# EAGLE board Qwiic MP3 Trigger-Panel (EAGLE 9.2.2), part 1 of 6
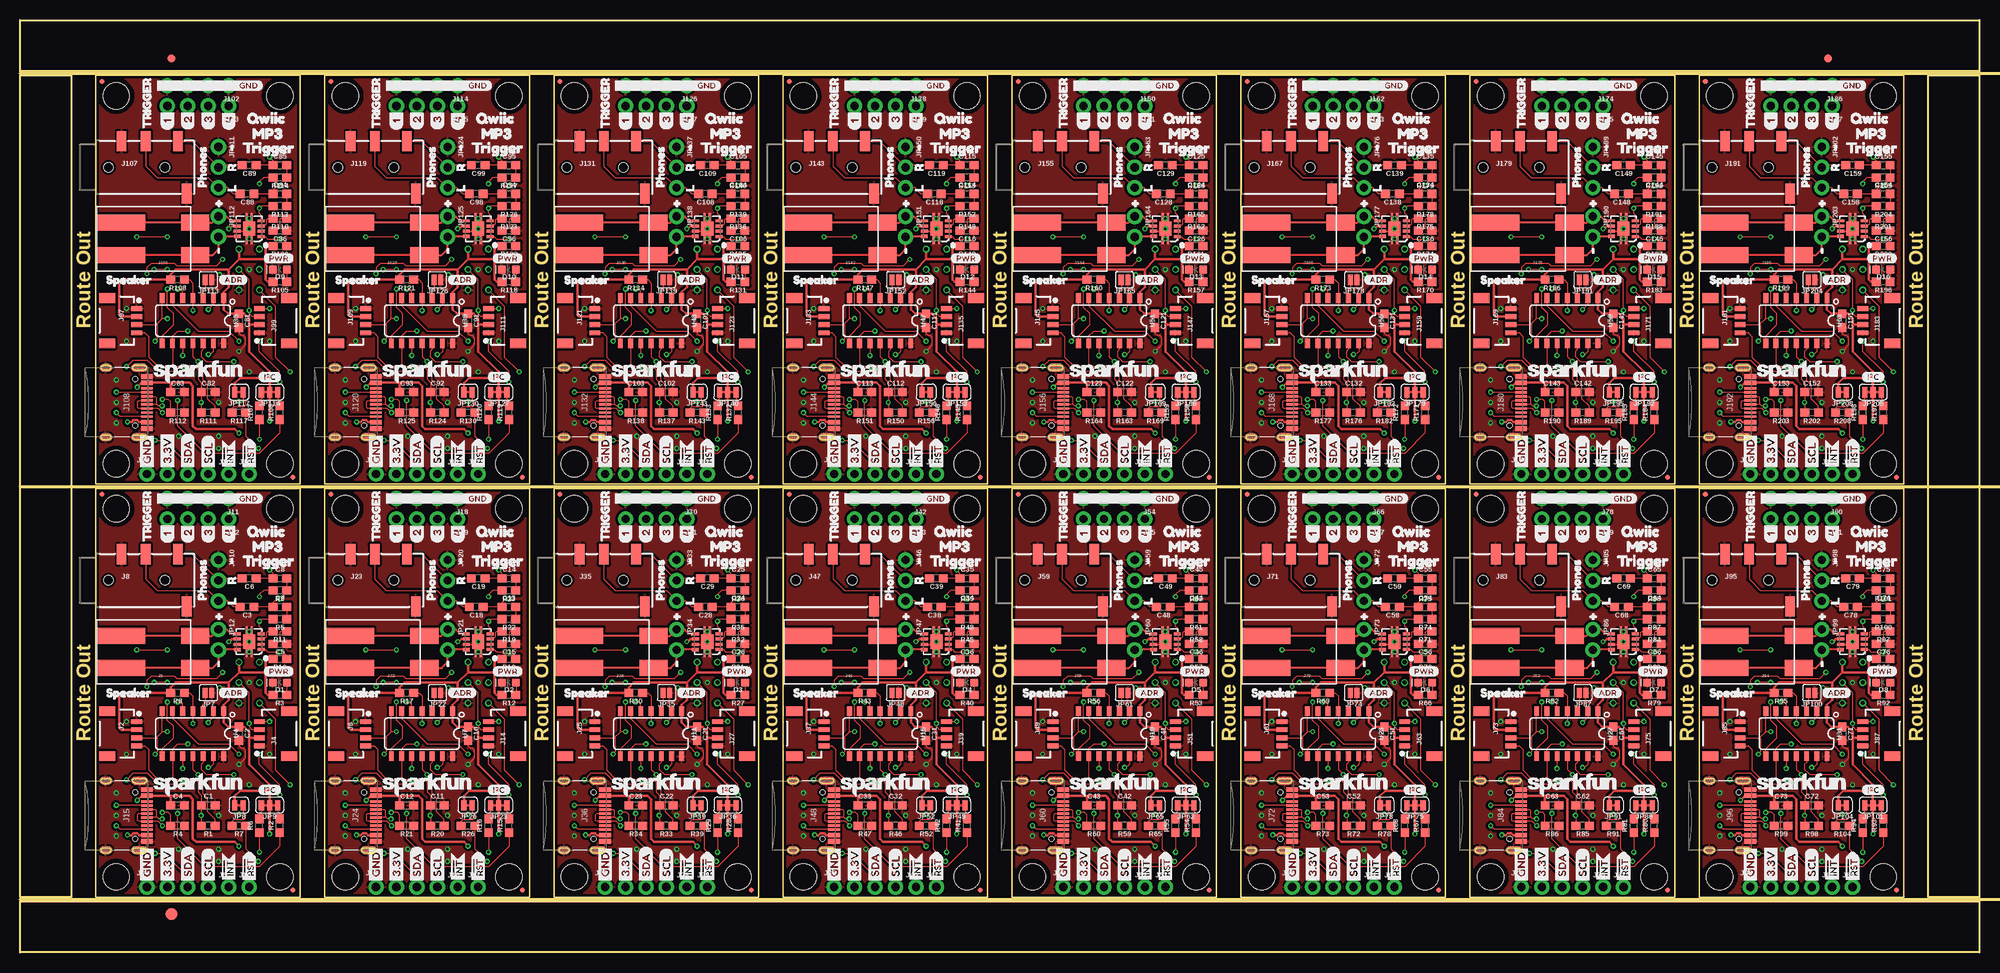
[diagram p0: board, top side]
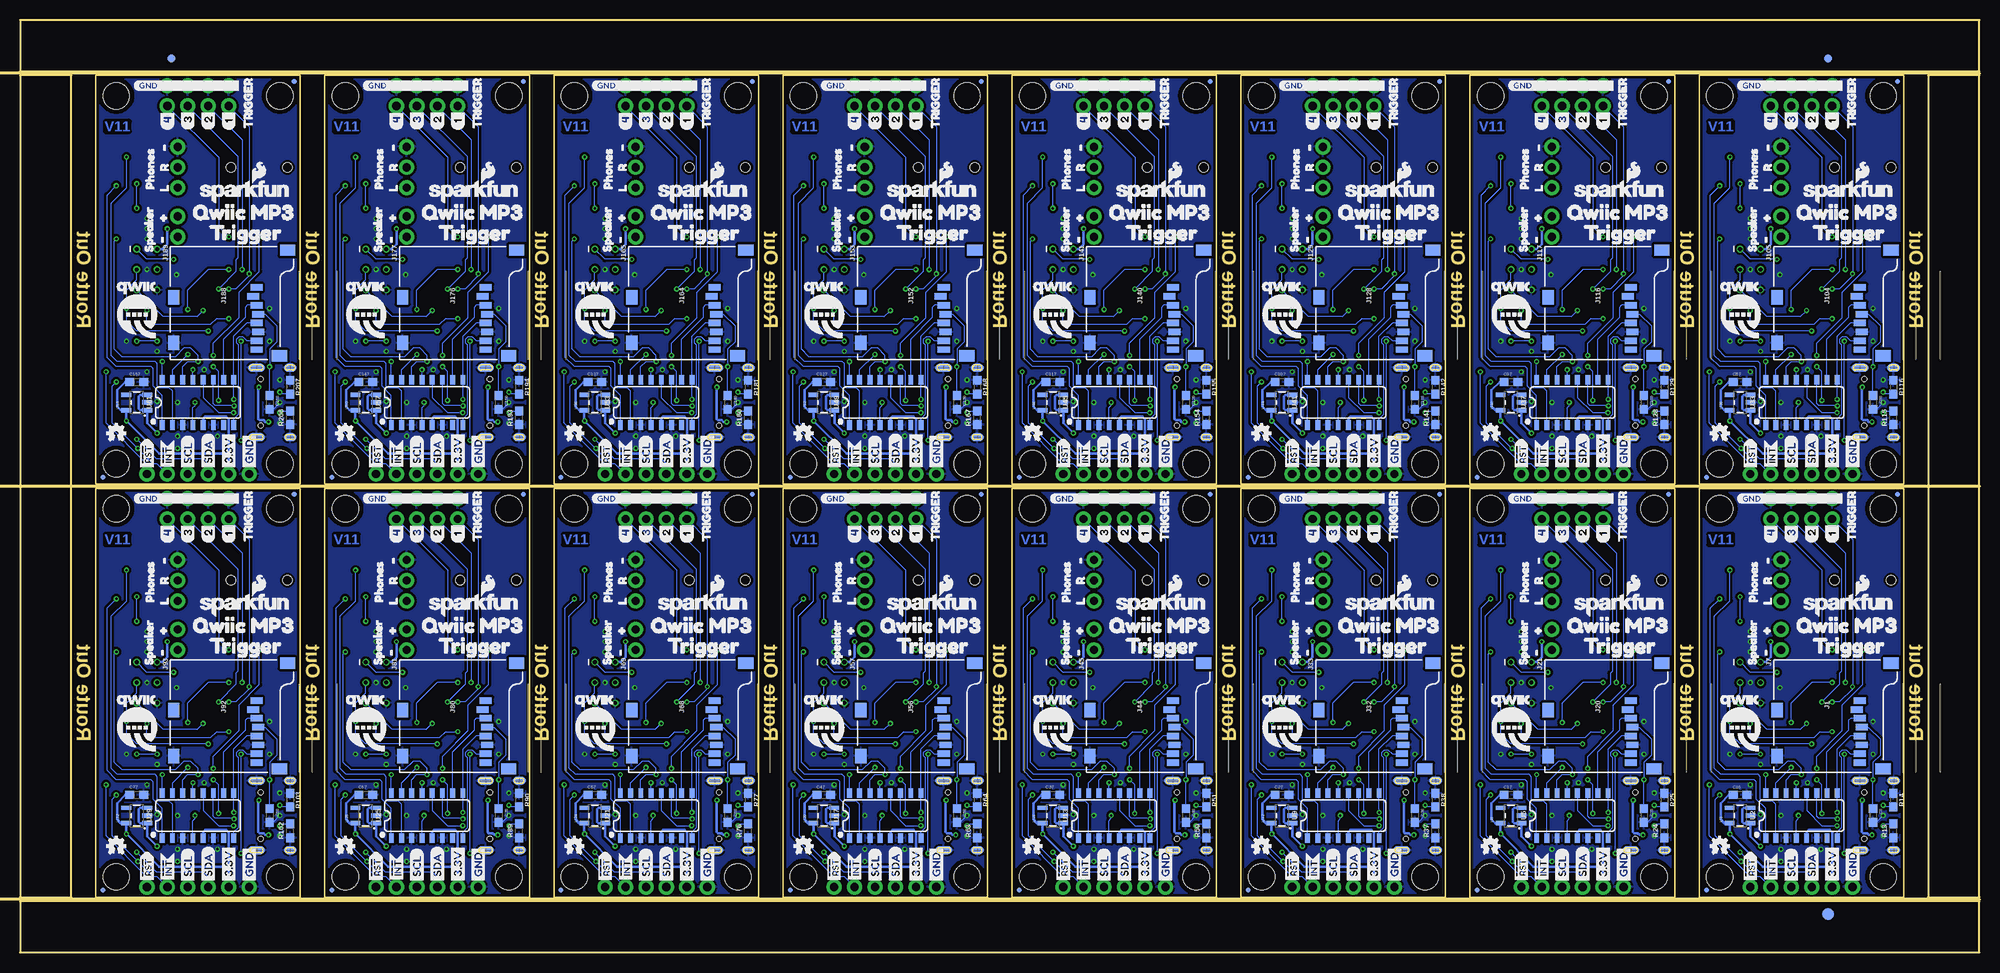
[diagram p1: board, bottom side, seen from below]

Size 243.33 x 115.82 mm. Coordinates in mm from the lower left corner, seen from the top.
Outline: 9.4,6.86 9.4,57.66 34.8,57.66 34.8,6.86 9.4,6.86
Outline: 37.85,6.86 37.85,57.66 63.25,57.66 63.25,6.86 37.85,6.86
Outline: 66.29,6.86 66.29,57.66 91.69,57.66 91.69,6.86 66.29,6.86
Outline: 94.74,6.86 94.74,57.66 120.14,57.66 120.14,6.86 94.74,6.86
Outline: 123.19,6.86 123.19,57.66 148.59,57.66 148.59,6.86 123.19,6.86
Outline: 151.64,6.86 151.64,57.66 177.04,57.66 177.04,6.86 151.64,6.86
Outline: 180.09,6.86 180.09,57.66 205.49,57.66 205.49,6.86 180.09,6.86
Outline: 208.53,6.86 208.53,57.66 233.93,57.66 233.93,6.86 208.53,6.86
Outline: 9.4,58.17 9.4,108.97 34.8,108.97 34.8,58.17 9.4,58.17
Outline: 37.85,58.17 37.85,108.97 63.25,108.97 63.25,58.17 37.85,58.17
Outline: 66.29,58.17 66.29,108.97 91.69,108.97 91.69,58.17 66.29,58.17
Outline: 94.74,58.17 94.74,108.97 120.14,108.97 120.14,58.17 94.74,58.17
Outline: 123.19,58.17 123.19,108.97 148.59,108.97 148.59,58.17 123.19,58.17
Outline: 151.64,58.17 151.64,108.97 177.04,108.97 177.04,58.17 151.64,58.17
Outline: 180.09,58.17 180.09,108.97 205.49,108.97 205.49,58.17 180.09,58.17
Outline: 208.53,58.17 208.53,108.97 233.93,108.97 233.93,58.17 208.53,58.17
Outline: 0,6.35 243.33,6.35 243.33,0 0,0 0,6.35
Outline: 236.98,108.97 243.33,108.97 243.33,6.86 236.98,6.86 236.98,108.97
Outline: 0,115.82 243.33,115.82 243.33,109.47 0,109.47 0,115.82
Outline: 0,108.97 6.35,108.97 6.35,6.86 0,6.86 0,108.97
Copper layers (1*16): Top 0.035mm / dielectric 1.5mm / Bottom 0.035mm
Design rules "SparkFun-2-layer-PCBWay-LIMIT": minimum track width 6mil, minimum drill 0.3mm, track to track 6mil, track to pad 6mil, pad to pad 6mil, via to via 6mil, smd to smd 6mil, copper to edge 6mil, drill to drill 6mil, minimum pad ring 6mil, minimum via ring 6mil, stop-mask expansion 4mil, vias tented up to drill 25mil, thermal gap 10mil
Net classes: 1 3.3V: width 0.305 mm
Milling: 3 lines

## Footprints (pad centres in the part's own frame; a part is rotated, then mirrored left to right if it is on the bottom)
0603 = smd 1.1 x 1: 1 -0.85,0; 2 0.85,0
LED-0603 = smd 1 x 1: A -0.877,0; C 0.877,0
FIDUCIAL-1X2 = smd 1 x 1: 1 0,0
FIDUCIAL-1.5X3 = smd 1.5 x 1.5: 1 0,0
MICRO-SD-SOCKET = smd 1.8 x 1.4: CD1 -2.05,0.4; CD2 -7.75,0.4 | smd 0.8 x 1.5: CS -7.84,10.3; DI -6.74,10.7; DO -2.34,10.7; GND -3.44,10.9; RSV1 -8.94,10.7; RSV2 -1.24,10.7; SCLK -4.54,10.7; VCC -5.64,10.9 | smd 1.4 x 1.9: GND1 -13.6,14.55; GND3 -0.45,13.55
1X04_1MM_RA = smd 0.6 x 1.35: 1 -1.5,0; 2 -0.5,0; 3 0.5,0; 4 1.5,0 | smd 1.2 x 2: NC1 2.8,-3.675; NC2 -2.8,-3.675
1X04_NO_SILK = drill 1.016 pad 1.88: 1 0,0; 2 2.54,0; 3 5.08,0; 4 7.62,0
1X01_NO_SILK = drill 1.016 pad 1.88: 1 0,0
2X3_TEST_POINTS = drill 0.508: 1 -2.54,-1.27; 2 -2.54,1.27; 3 0,-1.27; 4 0,1.27; 5 2.54,-1.27; 6 2.54,1.27
AUDIO_JACK_3.5MM_TRRS_SMD_RA = smd 1.2 x 2.5: EARTH 11.3,-3.25; RING1 6.2,3.25; RING2 3.2,3.25; TIP 10.2,3.25 | hole 1.2: 1.6,0; 8.6,0
1X02_POKEHOME = smd 3.5 x 2: P1 5.25,2; P2 5.25,-2 | smd 6 x 2: P3 -4,2; P4 -4,-2
USB-C-16P = smd 0.3 x 1.45: A5 -1.25,0; A6 -0.25,0; A7 0.25,0; A8 1.25,0; B5 1.75,0; B6 0.75,0; B7 -0.75,0; B8 -1.75,0 | smd 0.6 x 1.45: GND -3.225,0; GND2 3.225,0 | smd 1 x 2.1: SHLD1 -4.32,-0.915; SHLD2 4.32,-0.915 | smd 1 x 2.1 bottom: SHLD3 -4.32,-0.915; SHLD4 4.32,-0.915 | smd 1 x 1.6: SHLD5 -4.32,-5.095; SHLD8 4.32,-5.095 | smd 1 x 1.6 bottom: SHLD6 -4.32,-5.095; SHLD7 4.32,-5.095 | smd 0.55 x 1.45: VBUS1 -2.45,0; VBUS2 2.45,0 | hole 0.65: -2.89,-1.445; 2.89,-1.445
MICRO-FIDUCIAL = smd 0.635 x 0.635: 1 0,0
STAND-OFF = hole 3.302: 0,0
SMT-JUMPER_2_NO_SILK = smd 0.635 x 1.27: 1 -0.406,0; 2 0.406,0
SMT-JUMPER_2_NC_TRACE_SILK = smd 0.635 x 1.27: 1 -0.508,0; 2 0.508,0
SMT-JUMPER_3_2-NC_TRACE_SILK = smd 0.635 x 1.27: 1 -1.016,0; 2 0,0; 3 1.016,0
1X03_NO_SILK = drill 1.016 pad 1.88: 1 0,0; 2 2.54,0; 3 5.08,0
1X02_NO_SILK = drill 1.016 pad 1.88: 1 0,0; 2 2.54,0
QFN-8_PAD = smd 0.35 x 0.85: 1 -0.975,-1.475; 2 -0.325,-1.475; 3 0.325,-1.475; 4 0.975,-1.475; 5 0.975,1.475; 6 0.325,1.475; 7 -0.325,1.475; 8 -0.975,1.475 | smd 1.75 x 1.5: 9 0,0 | smd 1.025 x 0.28: 10 -1.387,-0.325; 11 1.387,-0.325; 12 1.387,0.325; 13 -1.387,0.325
SO16 = smd 0.6 x 1.2: 1 -4.445,-2.8; 2 -3.175,-2.8; 3 -1.905,-2.8; 4 -0.635,-2.8; 5 0.635,-2.8; 6 1.905,-2.8; 7 3.175,-2.8; 8 4.445,-2.8; 9 4.445,2.8; 10 3.175,2.8; 11 1.905,2.8; 12 0.635,2.8; 13 -0.635,2.8; 14 -1.905,2.8; 15 -3.175,2.8; 16 -4.445,2.8
SOT23-5 = smd 0.55 x 1.2: 1 -0.95,-1.3; 2 0,-1.3; 3 0.95,-1.3; 4 0.95,1.3; 5 -0.95,1.3
SO14 = smd 0.6 x 1.2: 1 -3.175,-2.8; 2 -1.905,-2.8; 3 -0.635,-2.8; 4 0.635,-2.8; 5 1.905,-2.8; 6 3.175,-2.8; 7 4.445,-2.8; 8 4.445,2.8; 9 3.175,2.8; 10 1.905,2.8; 11 0.635,2.8; 12 -0.635,2.8; 13 -1.905,2.8; 14 -3.175,2.8

## Placement (x,y rotation side)
C1  10uF  [0603]  23.37,18.29 0 top
C2  0.1uF  [0603]  27.18,27.18 270 top
C3  0.22uF  [0603]  28.19,42.93 180 top
C4  1.0uF  [0603]  19.56,18.29 0 top
C5  1.0uF  [0603]  32.26,38.35 180 top
C6  0.22uF  [0603]  28.45,46.48 180 top
C7  0.1uF  [0603]  32.26,42.93 0 top
C8  0.1uF  [0603]  32.26,46.48 0 top
C9  1.0uF  [0603]  13.21,17.02 270 bottom
C10  0.1uF  [0603]  55.63,27.18 270 top
C11  10uF  [0603]  51.82,18.29 0 top
C12  1.0uF  [0603]  48.01,18.29 0 top
C13  0.1uF  [0603]  60.71,42.93 0 top
C14  0.1uF  [0603]  60.71,46.48 0 top
C15  1.0uF  [0603]  60.71,38.35 180 top
C16  1.0uF  [0603]  29.72,19.56 0 bottom
C17  1.0uF  [0603]  58.17,19.56 0 bottom
C18  0.22uF  [0603]  56.64,42.93 180 top
C19  0.22uF  [0603]  56.9,46.48 180 top
C20  1.0uF  [0603]  41.66,17.02 270 bottom
C21  0.1uF  [0603]  84.07,27.18 270 top
C22  10uF  [0603]  80.26,18.29 0 top
C23  1.0uF  [0603]  76.45,18.29 0 top
C24  0.1uF  [0603]  89.15,42.93 0 top
C25  0.1uF  [0603]  89.15,46.48 0 top
C26  1.0uF  [0603]  89.15,38.35 180 top
C27  1.0uF  [0603]  86.61,19.56 0 bottom
C28  0.22uF  [0603]  85.09,42.93 180 top
C29  0.22uF  [0603]  85.34,46.48 180 top
C30  1.0uF  [0603]  70.1,17.02 270 bottom
C31  0.1uF  [0603]  112.52,27.18 270 top
C32  10uF  [0603]  108.71,18.29 0 top
C33  1.0uF  [0603]  104.9,18.29 0 top
C34  0.1uF  [0603]  117.6,42.93 0 top
C35  0.1uF  [0603]  117.6,46.48 0 top
C36  1.0uF  [0603]  117.6,38.35 180 top
C37  1.0uF  [0603]  115.06,19.56 0 bottom
C38  0.22uF  [0603]  113.54,42.93 180 top
C39  0.22uF  [0603]  113.79,46.48 180 top
C40  1.0uF  [0603]  98.55,17.02 270 bottom
C41  0.1uF  [0603]  140.97,27.18 270 top
C42  10uF  [0603]  137.16,18.29 0 top
C43  1.0uF  [0603]  133.35,18.29 0 top
C44  0.1uF  [0603]  146.05,42.93 0 top
C45  0.1uF  [0603]  146.05,46.48 0 top
C46  1.0uF  [0603]  146.05,38.35 180 top
C47  1.0uF  [0603]  143.51,19.56 0 bottom
C48  0.22uF  [0603]  141.99,42.93 180 top
C49  0.22uF  [0603]  142.24,46.48 180 top
C50  1.0uF  [0603]  127,17.02 270 bottom
C51  0.1uF  [0603]  169.42,27.18 270 top
C52  10uF  [0603]  165.61,18.29 0 top
C53  1.0uF  [0603]  161.8,18.29 0 top
C54  0.1uF  [0603]  174.5,42.93 0 top
C55  0.1uF  [0603]  174.5,46.48 0 top
C56  1.0uF  [0603]  174.5,38.35 180 top
C57  1.0uF  [0603]  171.96,19.56 0 bottom
C58  0.22uF  [0603]  170.43,42.93 180 top
C59  0.22uF  [0603]  170.69,46.48 180 top
C60  1.0uF  [0603]  155.45,17.02 270 bottom
C61  0.1uF  [0603]  197.87,27.18 270 top
C62  10uF  [0603]  194.06,18.29 0 top
C63  1.0uF  [0603]  190.25,18.29 0 top
C64  0.1uF  [0603]  202.95,42.93 0 top
C65  0.1uF  [0603]  202.95,46.48 0 top
C66  1.0uF  [0603]  202.95,38.35 180 top
C67  1.0uF  [0603]  200.41,19.56 0 bottom
C68  0.22uF  [0603]  198.88,42.93 180 top
C69  0.22uF  [0603]  199.14,46.48 180 top
C70  1.0uF  [0603]  183.9,17.02 270 bottom
C71  0.1uF  [0603]  226.31,27.18 270 top
C72  10uF  [0603]  222.5,18.29 0 top
C73  1.0uF  [0603]  218.69,18.29 0 top
C74  0.1uF  [0603]  231.39,42.93 0 top
C75  0.1uF  [0603]  231.39,46.48 0 top
C76  1.0uF  [0603]  231.39,38.35 180 top
C77  1.0uF  [0603]  228.85,19.56 0 bottom
C78  0.22uF  [0603]  227.33,42.93 180 top
C79  0.22uF  [0603]  227.58,46.48 180 top
C80  1.0uF  [0603]  212.34,17.02 270 bottom
C81  0.1uF  [0603]  27.18,78.49 270 top
C82  10uF  [0603]  23.37,69.6 0 top
C83  1.0uF  [0603]  19.56,69.6 0 top
C84  0.1uF  [0603]  32.26,94.23 0 top
C85  0.1uF  [0603]  32.26,97.79 0 top
C86  1.0uF  [0603]  32.26,89.66 180 top
C87  1.0uF  [0603]  29.72,70.87 0 bottom
C88  0.22uF  [0603]  28.19,94.23 180 top
C89  0.22uF  [0603]  28.45,97.79 180 top
C90  1.0uF  [0603]  13.21,68.33 270 bottom
C91  0.1uF  [0603]  55.63,78.49 270 top
C92  10uF  [0603]  51.82,69.6 0 top
C93  1.0uF  [0603]  48.01,69.6 0 top
C94  0.1uF  [0603]  60.71,94.23 0 top
C95  0.1uF  [0603]  60.71,97.79 0 top
C96  1.0uF  [0603]  60.71,89.66 180 top
C97  1.0uF  [0603]  58.17,70.87 0 bottom
C98  0.22uF  [0603]  56.64,94.23 180 top
C99  0.22uF  [0603]  56.9,97.79 180 top
C100  1.0uF  [0603]  41.66,68.33 270 bottom
C101  0.1uF  [0603]  84.07,78.49 270 top
C102  10uF  [0603]  80.26,69.6 0 top
C103  1.0uF  [0603]  76.45,69.6 0 top
C104  0.1uF  [0603]  89.15,94.23 0 top
C105  0.1uF  [0603]  89.15,97.79 0 top
C106  1.0uF  [0603]  89.15,89.66 180 top
C107  1.0uF  [0603]  86.61,70.87 0 bottom
C108  0.22uF  [0603]  85.09,94.23 180 top
C109  0.22uF  [0603]  85.34,97.79 180 top
C110  1.0uF  [0603]  70.1,68.33 270 bottom
C111  0.1uF  [0603]  112.52,78.49 270 top
C112  10uF  [0603]  108.71,69.6 0 top
C113  1.0uF  [0603]  104.9,69.6 0 top
C114  0.1uF  [0603]  117.6,94.23 0 top
C115  0.1uF  [0603]  117.6,97.79 0 top
C116  1.0uF  [0603]  117.6,89.66 180 top
C117  1.0uF  [0603]  115.06,70.87 0 bottom
C118  0.22uF  [0603]  113.54,94.23 180 top
C119  0.22uF  [0603]  113.79,97.79 180 top
C120  1.0uF  [0603]  98.55,68.33 270 bottom
C121  0.1uF  [0603]  140.97,78.49 270 top
C122  10uF  [0603]  137.16,69.6 0 top
C123  1.0uF  [0603]  133.35,69.6 0 top
C124  0.1uF  [0603]  146.05,94.23 0 top
C125  0.1uF  [0603]  146.05,97.79 0 top
C126  1.0uF  [0603]  146.05,89.66 180 top
C127  1.0uF  [0603]  143.51,70.87 0 bottom
C128  0.22uF  [0603]  141.99,94.23 180 top
C129  0.22uF  [0603]  142.24,97.79 180 top
C130  1.0uF  [0603]  127,68.33 270 bottom
C131  0.1uF  [0603]  169.42,78.49 270 top
C132  10uF  [0603]  165.61,69.6 0 top
C133  1.0uF  [0603]  161.8,69.6 0 top
C134  0.1uF  [0603]  174.5,94.23 0 top
C135  0.1uF  [0603]  174.5,97.79 0 top
C136  1.0uF  [0603]  174.5,89.66 180 top
C137  1.0uF  [0603]  171.96,70.87 0 bottom
C138  0.22uF  [0603]  170.43,94.23 180 top
C139  0.22uF  [0603]  170.69,97.79 180 top
C140  1.0uF  [0603]  155.45,68.33 270 bottom
C141  0.1uF  [0603]  197.87,78.49 270 top
C142  10uF  [0603]  194.06,69.6 0 top
C143  1.0uF  [0603]  190.25,69.6 0 top
C144  0.1uF  [0603]  202.95,94.23 0 top
C145  0.1uF  [0603]  202.95,97.79 0 top
C146  1.0uF  [0603]  202.95,89.66 180 top
C147  1.0uF  [0603]  200.41,70.87 0 bottom
C148  0.22uF  [0603]  198.88,94.23 180 top
C149  0.22uF  [0603]  199.14,97.79 180 top
C150  1.0uF  [0603]  183.9,68.33 270 bottom
C151  0.1uF  [0603]  226.31,78.49 270 top
C152  10uF  [0603]  222.5,69.6 0 top
C153  1.0uF  [0603]  218.69,69.6 0 top
C154  0.1uF  [0603]  231.39,94.23 0 top
C155  0.1uF  [0603]  231.39,97.79 0 top
C156  1.0uF  [0603]  231.39,89.66 180 top
C157  1.0uF  [0603]  228.85,70.87 0 bottom
C158  0.22uF  [0603]  227.33,94.23 180 top
C159  0.22uF  [0603]  227.58,97.79 180 top
C160  1.0uF  [0603]  212.34,68.33 270 bottom
D1  RED  [LED-0603]  32.26,33.53 180 top
D2  RED  [LED-0603]  60.71,33.53 180 top
D3  RED  [LED-0603]  89.15,33.53 180 top
D4  RED  [LED-0603]  117.6,33.53 180 top
D5  RED  [LED-0603]  146.05,33.53 180 top
D6  RED  [LED-0603]  174.5,33.53 180 top
D7  RED  [LED-0603]  202.95,33.53 180 top
D8  RED  [LED-0603]  231.39,33.53 180 top
D9  RED  [LED-0603]  32.26,84.84 180 top
D10  RED  [LED-0603]  60.71,84.84 180 top
D11  RED  [LED-0603]  89.15,84.84 180 top
D12  RED  [LED-0603]  117.6,84.84 180 top
D13  RED  [LED-0603]  146.05,84.84 180 top
D14  RED  [LED-0603]  174.5,84.84 180 top
D15  RED  [LED-0603]  202.95,84.84 180 top
D16  RED  [LED-0603]  231.39,84.84 180 top
E$1  [FIDUCIAL-1X2]  18.8,111.06 0 top
E$2  [FIDUCIAL-1X2]  18.8,111.06 0 bottom
E$3  [FIDUCIAL-1X2]  224.54,111.06 0 top
E$4  [FIDUCIAL-1X2]  224.54,111.06 0 bottom
E$5  [FIDUCIAL-1.5X3]  18.8,4.76 0 top
E$6  [FIDUCIAL-1.5X3]  18.8,4.76 0 bottom
J1  MICRO-SD  [MICRO-SD-SOCKET]  25.53,22.35 270 bottom
J2  [1X04_1MM_RA]  14.48,27.18 270 top
J3  PTH  [1X04_NO_SILK]  15.75,8.13 0 top
J4  [1X04_1MM_RA]  29.72,27.18 90 top
J5  [1X01_NO_SILK]  25.91,8.13 0 top
J6  [1X04_1MM_RA]  42.93,27.18 270 top
J7  ISP  [2X3_TEST_POINTS]  28.45,33.53 270 bottom
J8  3.5mm Audio  [AUDIO_JACK_3.5MM_TRRS_SMD_RA]  9.4,46.23 0 top
J9  Poke-Home  [1X02_POKEHOME]  16.51,37.34 0 top
J10  [1X01_NO_SILK]  28.45,8.13 0 top
J11  [1X04_NO_SILK]  25.91,56.39 180 top
J12  [1X04_NO_SILK]  25.91,53.85 180 top
J13  PTH  [1X04_NO_SILK]  44.2,8.13 0 top
J14  [1X04_1MM_RA]  58.17,27.18 90 top
J15  [USB-C-16P]  15.75,17.02 270 top
J16  [1X01_NO_SILK]  54.36,8.13 0 top
J17  [1X01_NO_SILK]  56.9,8.13 0 top
J18  [1X04_NO_SILK]  54.36,56.39 180 top
J19  [1X04_NO_SILK]  54.36,53.85 180 top
J20  MICRO-SD  [MICRO-SD-SOCKET]  53.97,22.35 270 bottom
J21  ISP  [2X3_TEST_POINTS]  56.9,33.53 270 bottom
J22  Poke-Home  [1X02_POKEHOME]  44.96,37.34 0 top
J23  3.5mm Audio  [AUDIO_JACK_3.5MM_TRRS_SMD_RA]  37.85,46.23 0 top
J24  [USB-C-16P]  44.2,17.02 270 top
J25  [1X04_1MM_RA]  71.37,27.18 270 top
J26  PTH  [1X04_NO_SILK]  72.64,8.13 0 top
J27  [1X04_1MM_RA]  86.61,27.18 90 top
J28  [1X01_NO_SILK]  82.8,8.13 0 top
J29  [1X01_NO_SILK]  85.34,8.13 0 top
J30  [1X04_NO_SILK]  82.8,56.39 180 top
J31  [1X04_NO_SILK]  82.8,53.85 180 top
J32  MICRO-SD  [MICRO-SD-SOCKET]  82.42,22.35 270 bottom
J33  ISP  [2X3_TEST_POINTS]  85.34,33.53 270 bottom
J34  Poke-Home  [1X02_POKEHOME]  73.41,37.34 0 top
J35  3.5mm Audio  [AUDIO_JACK_3.5MM_TRRS_SMD_RA]  66.29,46.23 0 top
J36  [USB-C-16P]  72.64,17.02 270 top
J37  [1X04_1MM_RA]  99.82,27.18 270 top
J38  PTH  [1X04_NO_SILK]  101.09,8.13 0 top
J39  [1X04_1MM_RA]  115.06,27.18 90 top
J40  [1X01_NO_SILK]  111.25,8.13 0 top
J41  [1X01_NO_SILK]  113.79,8.13 0 top
J42  [1X04_NO_SILK]  111.25,56.39 180 top
J43  [1X04_NO_SILK]  111.25,53.85 180 top
J44  MICRO-SD  [MICRO-SD-SOCKET]  110.87,22.35 270 bottom
J45  ISP  [2X3_TEST_POINTS]  113.79,33.53 270 bottom
J46  Poke-Home  [1X02_POKEHOME]  101.85,37.34 0 top
J47  3.5mm Audio  [AUDIO_JACK_3.5MM_TRRS_SMD_RA]  94.74,46.23 0 top
J48  [USB-C-16P]  101.09,17.02 270 top
J49  [1X04_1MM_RA]  128.27,27.18 270 top
J50  PTH  [1X04_NO_SILK]  129.54,8.13 0 top
J51  [1X04_1MM_RA]  143.51,27.18 90 top
J52  [1X01_NO_SILK]  139.7,8.13 0 top
J53  [1X01_NO_SILK]  142.24,8.13 0 top
J54  [1X04_NO_SILK]  139.7,56.39 180 top
J55  [1X04_NO_SILK]  139.7,53.85 180 top
J56  MICRO-SD  [MICRO-SD-SOCKET]  139.32,22.35 270 bottom
J57  ISP  [2X3_TEST_POINTS]  142.24,33.53 270 bottom
J58  Poke-Home  [1X02_POKEHOME]  130.3,37.34 0 top
J59  3.5mm Audio  [AUDIO_JACK_3.5MM_TRRS_SMD_RA]  123.19,46.23 0 top
J60  [USB-C-16P]  129.54,17.02 270 top
J61  [1X04_1MM_RA]  156.72,27.18 270 top
J62  PTH  [1X04_NO_SILK]  157.99,8.13 0 top
J63  [1X04_1MM_RA]  171.96,27.18 90 top
J64  [1X01_NO_SILK]  168.15,8.13 0 top
J65  [1X01_NO_SILK]  170.69,8.13 0 top
J66  [1X04_NO_SILK]  168.15,56.39 180 top
J67  [1X04_NO_SILK]  168.15,53.85 180 top
J68  MICRO-SD  [MICRO-SD-SOCKET]  167.77,22.35 270 bottom
J69  ISP  [2X3_TEST_POINTS]  170.69,33.53 270 bottom
J70  Poke-Home  [1X02_POKEHOME]  158.75,37.34 0 top
J71  3.5mm Audio  [AUDIO_JACK_3.5MM_TRRS_SMD_RA]  151.64,46.23 0 top
J72  [USB-C-16P]  157.99,17.02 270 top
J73  [1X04_1MM_RA]  185.17,27.18 270 top
J74  PTH  [1X04_NO_SILK]  186.44,8.13 0 top
J75  [1X04_1MM_RA]  200.41,27.18 90 top
J76  [1X01_NO_SILK]  196.6,8.13 0 top
J77  [1X01_NO_SILK]  199.14,8.13 0 top
J78  [1X04_NO_SILK]  196.6,56.39 180 top
J79  [1X04_NO_SILK]  196.6,53.85 180 top
J80  MICRO-SD  [MICRO-SD-SOCKET]  196.22,22.35 270 bottom
J81  ISP  [2X3_TEST_POINTS]  199.14,33.53 270 bottom
J82  Poke-Home  [1X02_POKEHOME]  187.2,37.34 0 top
J83  3.5mm Audio  [AUDIO_JACK_3.5MM_TRRS_SMD_RA]  180.09,46.23 0 top
J84  [USB-C-16P]  186.44,17.02 270 top
J85  [1X04_1MM_RA]  213.61,27.18 270 top
J86  PTH  [1X04_NO_SILK]  214.88,8.13 0 top
J87  [1X04_1MM_RA]  228.85,27.18 90 top
J88  [1X01_NO_SILK]  225.04,8.13 0 top
J89  [1X01_NO_SILK]  227.58,8.13 0 top
J90  [1X04_NO_SILK]  225.04,56.39 180 top
J91  [1X04_NO_SILK]  225.04,53.85 180 top
J92  MICRO-SD  [MICRO-SD-SOCKET]  224.66,22.35 270 bottom
J93  ISP  [2X3_TEST_POINTS]  227.58,33.53 270 bottom
J94  Poke-Home  [1X02_POKEHOME]  215.65,37.34 0 top
J95  3.5mm Audio  [AUDIO_JACK_3.5MM_TRRS_SMD_RA]  208.53,46.23 0 top
J96  [USB-C-16P]  214.88,17.02 270 top
J97  [1X04_1MM_RA]  14.48,78.49 270 top
J98  PTH  [1X04_NO_SILK]  15.75,59.44 0 top
J99  [1X04_1MM_RA]  29.72,78.49 90 top
J100  [1X01_NO_SILK]  25.91,59.44 0 top
J101  [1X01_NO_SILK]  28.45,59.44 0 top
J102  [1X04_NO_SILK]  25.91,107.7 180 top
J103  [1X04_NO_SILK]  25.91,105.16 180 top
J104  MICRO-SD  [MICRO-SD-SOCKET]  25.53,73.66 270 bottom
J105  ISP  [2X3_TEST_POINTS]  28.45,84.84 270 bottom
J106  Poke-Home  [1X02_POKEHOME]  16.51,88.65 0 top
J107  3.5mm Audio  [AUDIO_JACK_3.5MM_TRRS_SMD_RA]  9.4,97.54 0 top
J108  [USB-C-16P]  15.75,68.33 270 top
J109  [1X04_1MM_RA]  42.93,78.49 270 top
J110  PTH  [1X04_NO_SILK]  44.2,59.44 0 top
J111  [1X04_1MM_RA]  58.17,78.49 90 top
J112  [1X01_NO_SILK]  54.36,59.44 0 top
J113  [1X01_NO_SILK]  56.9,59.44 0 top
J114  [1X04_NO_SILK]  54.36,107.7 180 top
J115  [1X04_NO_SILK]  54.36,105.16 180 top
J116  MICRO-SD  [MICRO-SD-SOCKET]  53.97,73.66 270 bottom
J117  ISP  [2X3_TEST_POINTS]  56.9,84.84 270 bottom
J118  Poke-Home  [1X02_POKEHOME]  44.96,88.65 0 top
J119  3.5mm Audio  [AUDIO_JACK_3.5MM_TRRS_SMD_RA]  37.85,97.54 0 top
J120  [USB-C-16P]  44.2,68.33 270 top
J121  [1X04_1MM_RA]  71.37,78.49 270 top
J122  PTH  [1X04_NO_SILK]  72.64,59.44 0 top
J123  [1X04_1MM_RA]  86.61,78.49 90 top
J124  [1X01_NO_SILK]  82.8,59.44 0 top
J125  [1X01_NO_SILK]  85.34,59.44 0 top
J126  [1X04_NO_SILK]  82.8,107.7 180 top
J127  [1X04_NO_SILK]  82.8,105.16 180 top
J128  MICRO-SD  [MICRO-SD-SOCKET]  82.42,73.66 270 bottom
J129  ISP  [2X3_TEST_POINTS]  85.34,84.84 270 bottom
J130  Poke-Home  [1X02_POKEHOME]  73.41,88.65 0 top
J131  3.5mm Audio  [AUDIO_JACK_3.5MM_TRRS_SMD_RA]  66.29,97.54 0 top
J132  [USB-C-16P]  72.64,68.33 270 top
J133  [1X04_1MM_RA]  99.82,78.49 270 top
J134  PTH  [1X04_NO_SILK]  101.09,59.44 0 top
J135  [1X04_1MM_RA]  115.06,78.49 90 top
J136  [1X01_NO_SILK]  111.25,59.44 0 top
J137  [1X01_NO_SILK]  113.79,59.44 0 top
J138  [1X04_NO_SILK]  111.25,107.7 180 top
J139  [1X04_NO_SILK]  111.25,105.16 180 top
J140  MICRO-SD  [MICRO-SD-SOCKET]  110.87,73.66 270 bottom
J141  ISP  [2X3_TEST_POINTS]  113.79,84.84 270 bottom
J142  Poke-Home  [1X02_POKEHOME]  101.85,88.65 0 top
J143  3.5mm Audio  [AUDIO_JACK_3.5MM_TRRS_SMD_RA]  94.74,97.54 0 top
J144  [USB-C-16P]  101.09,68.33 270 top
J145  [1X04_1MM_RA]  128.27,78.49 270 top
J146  PTH  [1X04_NO_SILK]  129.54,59.44 0 top
J147  [1X04_1MM_RA]  143.51,78.49 90 top
J148  [1X01_NO_SILK]  139.7,59.44 0 top
J149  [1X01_NO_SILK]  142.24,59.44 0 top
J150  [1X04_NO_SILK]  139.7,107.7 180 top
J151  [1X04_NO_SILK]  139.7,105.16 180 top
J152  MICRO-SD  [MICRO-SD-SOCKET]  139.32,73.66 270 bottom
J153  ISP  [2X3_TEST_POINTS]  142.24,84.84 270 bottom
J154  Poke-Home  [1X02_POKEHOME]  130.3,88.65 0 top
J155  3.5mm Audio  [AUDIO_JACK_3.5MM_TRRS_SMD_RA]  123.19,97.54 0 top
J156  [USB-C-16P]  129.54,68.33 270 top
J157  [1X04_1MM_RA]  156.72,78.49 270 top
J158  PTH  [1X04_NO_SILK]  157.99,59.44 0 top
J159  [1X04_1MM_RA]  171.96,78.49 90 top
J160  [1X01_NO_SILK]  168.15,59.44 0 top
J161  [1X01_NO_SILK]  170.69,59.44 0 top
J162  [1X04_NO_SILK]  168.15,107.7 180 top
J163  [1X04_NO_SILK]  168.15,105.16 180 top
J164  MICRO-SD  [MICRO-SD-SOCKET]  167.77,73.66 270 bottom
J165  ISP  [2X3_TEST_POINTS]  170.69,84.84 270 bottom
J166  Poke-Home  [1X02_POKEHOME]  158.75,88.65 0 top
J167  3.5mm Audio  [AUDIO_JACK_3.5MM_TRRS_SMD_RA]  151.64,97.54 0 top
J168  [USB-C-16P]  157.99,68.33 270 top
J169  [1X04_1MM_RA]  185.17,78.49 270 top
J170  PTH  [1X04_NO_SILK]  186.44,59.44 0 top
J171  [1X04_1MM_RA]  200.41,78.49 90 top
J172  [1X01_NO_SILK]  196.6,59.44 0 top
J173  [1X01_NO_SILK]  199.14,59.44 0 top
J174  [1X04_NO_SILK]  196.6,107.7 180 top
J175  [1X04_NO_SILK]  196.6,105.16 180 top
J176  MICRO-SD  [MICRO-SD-SOCKET]  196.22,73.66 270 bottom
J177  ISP  [2X3_TEST_POINTS]  199.14,84.84 270 bottom
J178  Poke-Home  [1X02_POKEHOME]  187.2,88.65 0 top
J179  3.5mm Audio  [AUDIO_JACK_3.5MM_TRRS_SMD_RA]  180.09,97.54 0 top
J180  [USB-C-16P]  186.44,68.33 270 top
J181  [1X04_1MM_RA]  213.61,78.49 270 top
J182  PTH  [1X04_NO_SILK]  214.88,59.44 0 top
J183  [1X04_1MM_RA]  228.85,78.49 90 top
J184  [1X01_NO_SILK]  225.04,59.44 0 top
J185  [1X01_NO_SILK]  227.58,59.44 0 top
J186  [1X04_NO_SILK]  225.04,107.7 180 top
J187  [1X04_NO_SILK]  225.04,105.16 180 top
J188  MICRO-SD  [MICRO-SD-SOCKET]  224.66,73.66 270 bottom
J189  ISP  [2X3_TEST_POINTS]  227.58,84.84 270 bottom
J190  Poke-Home  [1X02_POKEHOME]  215.65,88.65 0 top
J191  3.5mm Audio  [AUDIO_JACK_3.5MM_TRRS_SMD_RA]  208.53,97.54 0 top
J192  [USB-C-16P]  214.88,68.33 270 top
JP1  FIDUCIALUFIDUCIAL  [MICRO-FIDUCIAL]  10.16,56.9 0 bottom
JP2  FIDUCIALUFIDUCIAL  [MICRO-FIDUCIAL]  33.91,7.75 0 top
JP3  STAND-OFF  [STAND-OFF]  11.94,55.12 0 top
JP4  STAND-OFF  [STAND-OFF]  32.26,55.12 0 top
JP5  FIDUCIALUFIDUCIAL  [MICRO-FIDUCIAL]  33.91,7.75 0 bottom
JP6  FIDUCIALUFIDUCIAL  [MICRO-FIDUCIAL]  10.16,56.9 0 top
JP7  ADR  [SMT-JUMPER_2_NO_SILK]  23.37,32.26 180 top
JP8  INT  [SMT-JUMPER_2_NC_TRACE_SILK]  27.18,18.29 180 top
JP9  [SMT-JUMPER_3_2-NC_TRACE_SILK]  30.99,18.29 180 top
JP10  PTH  [1X03_NO_SILK]  24.64,48.77 270 top
JP11  STAND-OFF  [STAND-OFF]  11.94,9.4 0 top
JP12  PTH  [1X02_NO_SILK]  24.64,40.13 270 top
JP13  STAND-OFF  [STAND-OFF]  32.26,9.4 0 top
JP14  STAND-OFF  [STAND-OFF]  40.39,55.12 0 top
JP15  STAND-OFF  [STAND-OFF]  60.71,55.12 0 top
JP16  FIDUCIALUFIDUCIAL  [MICRO-FIDUCIAL]  62.36,7.75 0 top
JP17  FIDUCIALUFIDUCIAL  [MICRO-FIDUCIAL]  38.61,56.9 0 top
JP18  FIDUCIALUFIDUCIAL  [MICRO-FIDUCIAL]  38.61,56.9 0 bottom
JP19  FIDUCIALUFIDUCIAL  [MICRO-FIDUCIAL]  62.36,7.75 0 bottom
JP20  PTH  [1X03_NO_SILK]  53.09,48.77 270 top
JP21  PTH  [1X02_NO_SILK]  53.09,40.13 270 top
JP22  ADR  [SMT-JUMPER_2_NO_SILK]  51.82,32.26 180 top
JP23  [SMT-JUMPER_3_2-NC_TRACE_SILK]  59.44,18.29 180 top
JP24  STAND-OFF  [STAND-OFF]  40.39,9.4 0 top
JP25  STAND-OFF  [STAND-OFF]  60.71,9.4 0 top
JP26  INT  [SMT-JUMPER_2_NC_TRACE_SILK]  55.63,18.29 180 top
JP27  STAND-OFF  [STAND-OFF]  68.83,55.12 0 top
JP28  STAND-OFF  [STAND-OFF]  89.15,55.12 0 top
JP29  FIDUCIALUFIDUCIAL  [MICRO-FIDUCIAL]  90.8,7.75 0 top
JP30  FIDUCIALUFIDUCIAL  [MICRO-FIDUCIAL]  67.06,56.9 0 top
JP31  FIDUCIALUFIDUCIAL  [MICRO-FIDUCIAL]  67.06,56.9 0 bottom
JP32  FIDUCIALUFIDUCIAL  [MICRO-FIDUCIAL]  90.8,7.75 0 bottom
JP33  PTH  [1X03_NO_SILK]  81.53,48.77 270 top
JP34  PTH  [1X02_NO_SILK]  81.53,40.13 270 top
JP35  ADR  [SMT-JUMPER_2_NO_SILK]  80.26,32.26 180 top
JP36  [SMT-JUMPER_3_2-NC_TRACE_SILK]  87.88,18.29 180 top
JP37  STAND-OFF  [STAND-OFF]  68.83,9.4 0 top
JP38  STAND-OFF  [STAND-OFF]  89.15,9.4 0 top
JP39  INT  [SMT-JUMPER_2_NC_TRACE_SILK]  84.07,18.29 180 top
JP40  STAND-OFF  [STAND-OFF]  97.28,55.12 0 top
JP41  STAND-OFF  [STAND-OFF]  117.6,55.12 0 top
JP42  FIDUCIALUFIDUCIAL  [MICRO-FIDUCIAL]  119.25,7.75 0 top
JP43  FIDUCIALUFIDUCIAL  [MICRO-FIDUCIAL]  95.5,56.9 0 top
JP44  FIDUCIALUFIDUCIAL  [MICRO-FIDUCIAL]  95.5,56.9 0 bottom
JP45  FIDUCIALUFIDUCIAL  [MICRO-FIDUCIAL]  119.25,7.75 0 bottom
JP46  PTH  [1X03_NO_SILK]  109.98,48.77 270 top
JP47  PTH  [1X02_NO_SILK]  109.98,40.13 270 top
JP48  ADR  [SMT-JUMPER_2_NO_SILK]  108.71,32.26 180 top
JP49  [SMT-JUMPER_3_2-NC_TRACE_SILK]  116.33,18.29 180 top
JP50  STAND-OFF  [STAND-OFF]  97.28,9.4 0 top
JP51  STAND-OFF  [STAND-OFF]  117.6,9.4 0 top
JP52  INT  [SMT-JUMPER_2_NC_TRACE_SILK]  112.52,18.29 180 top
JP53  STAND-OFF  [STAND-OFF]  125.73,55.12 0 top
JP54  STAND-OFF  [STAND-OFF]  146.05,55.12 0 top
JP55  FIDUCIALUFIDUCIAL  [MICRO-FIDUCIAL]  147.7,7.75 0 top
JP56  FIDUCIALUFIDUCIAL  [MICRO-FIDUCIAL]  123.95,56.9 0 top
JP57  FIDUCIALUFIDUCIAL  [MICRO-FIDUCIAL]  123.95,56.9 0 bottom
JP58  FIDUCIALUFIDUCIAL  [MICRO-FIDUCIAL]  147.7,7.75 0 bottom
JP59  PTH  [1X03_NO_SILK]  138.43,48.77 270 top
JP60  PTH  [1X02_NO_SILK]  138.43,40.13 270 top
JP61  ADR  [SMT-JUMPER_2_NO_SILK]  137.16,32.26 180 top
JP62  [SMT-JUMPER_3_2-NC_TRACE_SILK]  144.78,18.29 180 top
JP63  STAND-OFF  [STAND-OFF]  125.73,9.4 0 top
JP64  STAND-OFF  [STAND-OFF]  146.05,9.4 0 top
JP65  INT  [SMT-JUMPER_2_NC_TRACE_SILK]  140.97,18.29 180 top
JP66  STAND-OFF  [STAND-OFF]  154.18,55.12 0 top
JP67  STAND-OFF  [STAND-OFF]  174.5,55.12 0 top
JP68  FIDUCIALUFIDUCIAL  [MICRO-FIDUCIAL]  176.15,7.75 0 top
JP69  FIDUCIALUFIDUCIAL  [MICRO-FIDUCIAL]  152.4,56.9 0 top
JP70  FIDUCIALUFIDUCIAL  [MICRO-FIDUCIAL]  152.4,56.9 0 bottom
JP71  FIDUCIALUFIDUCIAL  [MICRO-FIDUCIAL]  176.15,7.75 0 bottom
JP72  PTH  [1X03_NO_SILK]  166.88,48.77 270 top
JP73  PTH  [1X02_NO_SILK]  166.88,40.13 270 top
JP74  ADR  [SMT-JUMPER_2_NO_SILK]  165.61,32.26 180 top
JP75  [SMT-JUMPER_3_2-NC_TRACE_SILK]  173.23,18.29 180 top
JP76  STAND-OFF  [STAND-OFF]  154.18,9.4 0 top
JP77  STAND-OFF  [STAND-OFF]  174.5,9.4 0 top
JP78  INT  [SMT-JUMPER_2_NC_TRACE_SILK]  169.42,18.29 180 top
JP79  STAND-OFF  [STAND-OFF]  182.63,55.12 0 top
JP80  STAND-OFF  [STAND-OFF]  202.95,55.12 0 top
JP81  FIDUCIALUFIDUCIAL  [MICRO-FIDUCIAL]  204.6,7.75 0 top
JP82  FIDUCIALUFIDUCIAL  [MICRO-FIDUCIAL]  180.85,56.9 0 top
JP83  FIDUCIALUFIDUCIAL  [MICRO-FIDUCIAL]  180.85,56.9 0 bottom
JP84  FIDUCIALUFIDUCIAL  [MICRO-FIDUCIAL]  204.6,7.75 0 bottom
JP85  PTH  [1X03_NO_SILK]  195.33,48.77 270 top
JP86  PTH  [1X02_NO_SILK]  195.33,40.13 270 top
JP87  ADR  [SMT-JUMPER_2_NO_SILK]  194.06,32.26 180 top
JP88  [SMT-JUMPER_3_2-NC_TRACE_SILK]  201.68,18.29 180 top
JP89  STAND-OFF  [STAND-OFF]  182.63,9.4 0 top
JP90  STAND-OFF  [STAND-OFF]  202.95,9.4 0 top
JP91  INT  [SMT-JUMPER_2_NC_TRACE_SILK]  197.87,18.29 180 top
JP92  STAND-OFF  [STAND-OFF]  211.07,55.12 0 top
JP93  STAND-OFF  [STAND-OFF]  231.39,55.12 0 top
JP94  FIDUCIALUFIDUCIAL  [MICRO-FIDUCIAL]  233.04,7.75 0 top
JP95  FIDUCIALUFIDUCIAL  [MICRO-FIDUCIAL]  209.3,56.9 0 top
JP96  FIDUCIALUFIDUCIAL  [MICRO-FIDUCIAL]  209.3,56.9 0 bottom
JP97  FIDUCIALUFIDUCIAL  [MICRO-FIDUCIAL]  233.04,7.75 0 bottom
JP98  PTH  [1X03_NO_SILK]  223.77,48.77 270 top
JP99  PTH  [1X02_NO_SILK]  223.77,40.13 270 top
JP100  ADR  [SMT-JUMPER_2_NO_SILK]  222.5,32.26 180 top
JP101  [SMT-JUMPER_3_2-NC_TRACE_SILK]  230.12,18.29 180 top
JP102  STAND-OFF  [STAND-OFF]  211.07,9.4 0 top
JP103  STAND-OFF  [STAND-OFF]  231.39,9.4 0 top
JP104  INT  [SMT-JUMPER_2_NC_TRACE_SILK]  226.31,18.29 180 top
JP105  STAND-OFF  [STAND-OFF]  11.94,106.43 0 top
JP106  STAND-OFF  [STAND-OFF]  32.26,106.43 0 top
JP107  FIDUCIALUFIDUCIAL  [MICRO-FIDUCIAL]  33.91,59.05 0 top
JP108  FIDUCIALUFIDUCIAL  [MICRO-FIDUCIAL]  10.16,108.2 0 top
JP109  FIDUCIALUFIDUCIAL  [MICRO-FIDUCIAL]  10.16,108.2 0 bottom
JP110  FIDUCIALUFIDUCIAL  [MICRO-FIDUCIAL]  33.91,59.05 0 bottom
JP111  PTH  [1X03_NO_SILK]  24.64,100.08 270 top
JP112  PTH  [1X02_NO_SILK]  24.64,91.44 270 top
JP113  ADR  [SMT-JUMPER_2_NO_SILK]  23.37,83.57 180 top
JP114  [SMT-JUMPER_3_2-NC_TRACE_SILK]  30.99,69.6 180 top
JP115  STAND-OFF  [STAND-OFF]  11.94,60.71 0 top
JP116  STAND-OFF  [STAND-OFF]  32.26,60.71 0 top
JP117  INT  [SMT-JUMPER_2_NC_TRACE_SILK]  27.18,69.6 180 top
JP118  STAND-OFF  [STAND-OFF]  40.39,106.43 0 top
JP119  STAND-OFF  [STAND-OFF]  60.71,106.43 0 top
JP120  FIDUCIALUFIDUCIAL  [MICRO-FIDUCIAL]  62.36,59.05 0 top
JP121  FIDUCIALUFIDUCIAL  [MICRO-FIDUCIAL]  38.61,108.2 0 top
JP122  FIDUCIALUFIDUCIAL  [MICRO-FIDUCIAL]  38.61,108.2 0 bottom
JP123  FIDUCIALUFIDUCIAL  [MICRO-FIDUCIAL]  62.36,59.05 0 bottom
JP124  PTH  [1X03_NO_SILK]  53.09,100.08 270 top
JP125  PTH  [1X02_NO_SILK]  53.09,91.44 270 top
JP126  ADR  [SMT-JUMPER_2_NO_SILK]  51.82,83.57 180 top
JP127  [SMT-JUMPER_3_2-NC_TRACE_SILK]  59.44,69.6 180 top
JP128  STAND-OFF  [STAND-OFF]  40.39,60.71 0 top
JP129  STAND-OFF  [STAND-OFF]  60.71,60.71 0 top
JP130  INT  [SMT-JUMPER_2_NC_TRACE_SILK]  55.63,69.6 180 top
JP131  STAND-OFF  [STAND-OFF]  68.83,106.43 0 top
JP132  STAND-OFF  [STAND-OFF]  89.15,106.43 0 top
JP133  FIDUCIALUFIDUCIAL  [MICRO-FIDUCIAL]  90.8,59.05 0 top
JP134  FIDUCIALUFIDUCIAL  [MICRO-FIDUCIAL]  67.06,108.2 0 top
JP135  FIDUCIALUFIDUCIAL  [MICRO-FIDUCIAL]  67.06,108.2 0 bottom
JP136  FIDUCIALUFIDUCIAL  [MICRO-FIDUCIAL]  90.8,59.05 0 bottom
JP137  PTH  [1X03_NO_SILK]  81.53,100.08 270 top
JP138  PTH  [1X02_NO_SILK]  81.53,91.44 270 top
JP139  ADR  [SMT-JUMPER_2_NO_SILK]  80.26,83.57 180 top
JP140  [SMT-JUMPER_3_2-NC_TRACE_SILK]  87.88,69.6 180 top
JP141  STAND-OFF  [STAND-OFF]  68.83,60.71 0 top
JP142  STAND-OFF  [STAND-OFF]  89.15,60.71 0 top
JP143  INT  [SMT-JUMPER_2_NC_TRACE_SILK]  84.07,69.6 180 top
JP144  STAND-OFF  [STAND-OFF]  97.28,106.43 0 top
JP145  STAND-OFF  [STAND-OFF]  117.6,106.43 0 top
JP146  FIDUCIALUFIDUCIAL  [MICRO-FIDUCIAL]  119.25,59.05 0 top
JP147  FIDUCIALUFIDUCIAL  [MICRO-FIDUCIAL]  95.5,108.2 0 top
JP148  FIDUCIALUFIDUCIAL  [MICRO-FIDUCIAL]  95.5,108.2 0 bottom
JP149  FIDUCIALUFIDUCIAL  [MICRO-FIDUCIAL]  119.25,59.05 0 bottom
JP150  PTH  [1X03_NO_SILK]  109.98,100.08 270 top
JP151  PTH  [1X02_NO_SILK]  109.98,91.44 270 top
JP152  ADR  [SMT-JUMPER_2_NO_SILK]  108.71,83.57 180 top
JP153  [SMT-JUMPER_3_2-NC_TRACE_SILK]  116.33,69.6 180 top
JP154  STAND-OFF  [STAND-OFF]  97.28,60.71 0 top
JP155  STAND-OFF  [STAND-OFF]  117.6,60.71 0 top
JP156  INT  [SMT-JUMPER_2_NC_TRACE_SILK]  112.52,69.6 180 top
JP157  STAND-OFF  [STAND-OFF]  125.73,106.43 0 top
JP158  STAND-OFF  [STAND-OFF]  146.05,106.43 0 top
JP159  FIDUCIALUFIDUCIAL  [MICRO-FIDUCIAL]  147.7,59.05 0 top
JP160  FIDUCIALUFIDUCIAL  [MICRO-FIDUCIAL]  123.95,108.2 0 top
JP161  FIDUCIALUFIDUCIAL  [MICRO-FIDUCIAL]  123.95,108.2 0 bottom
JP162  FIDUCIALUFIDUCIAL  [MICRO-FIDUCIAL]  147.7,59.05 0 bottom
JP163  PTH  [1X03_NO_SILK]  138.43,100.08 270 top
JP164  PTH  [1X02_NO_SILK]  138.43,91.44 270 top
JP165  ADR  [SMT-JUMPER_2_NO_SILK]  137.16,83.57 180 top
JP166  [SMT-JUMPER_3_2-NC_TRACE_SILK]  144.78,69.6 180 top
JP167  STAND-OFF  [STAND-OFF]  125.73,60.71 0 top
JP168  STAND-OFF  [STAND-OFF]  146.05,60.71 0 top
JP169  INT  [SMT-JUMPER_2_NC_TRACE_SILK]  140.97,69.6 180 top
JP170  STAND-OFF  [STAND-OFF]  154.18,106.43 0 top
JP171  STAND-OFF  [STAND-OFF]  174.5,106.43 0 top
JP172  FIDUCIALUFIDUCIAL  [MICRO-FIDUCIAL]  176.15,59.05 0 top
JP173  FIDUCIALUFIDUCIAL  [MICRO-FIDUCIAL]  152.4,108.2 0 top
JP174  FIDUCIALUFIDUCIAL  [MICRO-FIDUCIAL]  152.4,108.2 0 bottom
JP175  FIDUCIALUFIDUCIAL  [MICRO-FIDUCIAL]  176.15,59.05 0 bottom
JP176  PTH  [1X03_NO_SILK]  166.88,100.08 270 top
JP177  PTH  [1X02_NO_SILK]  166.88,91.44 270 top
JP178  ADR  [SMT-JUMPER_2_NO_SILK]  165.61,83.57 180 top
JP179  [SMT-JUMPER_3_2-NC_TRACE_SILK]  173.23,69.6 180 top
JP180  STAND-OFF  [STAND-OFF]  154.18,60.71 0 top
JP181  STAND-OFF  [STAND-OFF]  174.5,60.71 0 top
JP182  INT  [SMT-JUMPER_2_NC_TRACE_SILK]  169.42,69.6 180 top
JP183  STAND-OFF  [STAND-OFF]  182.63,106.43 0 top
JP184  STAND-OFF  [STAND-OFF]  202.95,106.43 0 top
JP185  FIDUCIALUFIDUCIAL  [MICRO-FIDUCIAL]  204.6,59.05 0 top
JP186  FIDUCIALUFIDUCIAL  [MICRO-FIDUCIAL]  180.85,108.2 0 top
JP187  FIDUCIALUFIDUCIAL  [MICRO-FIDUCIAL]  180.85,108.2 0 bottom
JP188  FIDUCIALUFIDUCIAL  [MICRO-FIDUCIAL]  204.6,59.05 0 bottom
JP189  PTH  [1X03_NO_SILK]  195.33,100.08 270 top
JP190  PTH  [1X02_NO_SILK]  195.33,91.44 270 top
JP191  ADR  [SMT-JUMPER_2_NO_SILK]  194.06,83.57 180 top
JP192  [SMT-JUMPER_3_2-NC_TRACE_SILK]  201.68,69.6 180 top
JP193  STAND-OFF  [STAND-OFF]  182.63,60.71 0 top
JP194  STAND-OFF  [STAND-OFF]  202.95,60.71 0 top
JP195  INT  [SMT-JUMPER_2_NC_TRACE_SILK]  197.87,69.6 180 top
JP196  STAND-OFF  [STAND-OFF]  211.07,106.43 0 top
JP197  STAND-OFF  [STAND-OFF]  231.39,106.43 0 top
JP198  FIDUCIALUFIDUCIAL  [MICRO-FIDUCIAL]  233.04,59.05 0 top
JP199  FIDUCIALUFIDUCIAL  [MICRO-FIDUCIAL]  209.3,108.2 0 top
JP200  FIDUCIALUFIDUCIAL  [MICRO-FIDUCIAL]  209.3,108.2 0 bottom
JP201  FIDUCIALUFIDUCIAL  [MICRO-FIDUCIAL]  233.04,59.05 0 bottom
JP202  PTH  [1X03_NO_SILK]  223.77,100.08 270 top
JP203  PTH  [1X02_NO_SILK]  223.77,91.44 270 top
JP204  ADR  [SMT-JUMPER_2_NO_SILK]  222.5,83.57 180 top
JP205  [SMT-JUMPER_3_2-NC_TRACE_SILK]  230.12,69.6 180 top
JP206  STAND-OFF  [STAND-OFF]  211.07,60.71 0 top
JP207  STAND-OFF  [STAND-OFF]  231.39,60.71 0 top
JP208  INT  [SMT-JUMPER_2_NC_TRACE_SILK]  226.31,69.6 180 top
LOGO1  OSHW-LOGOMINI  [OSHW-LOGO-MINI]  32.26,13.21 0 bottom
LOGO2  SFE_LOGO_NAME.1_INCH  [SFE_LOGO_NAME_.1]  22.1,20.83 0 top
LOGO3  SFE_LOGO_NAME_FLAME.1_INCH  [SFE_LOGO_NAME_FLAME_.1]  16.26,43.18 0 bottom
LOGO4  OSHW-LOGOMINI  [OSHW-LOGO-MINI]  60.71,13.21 0 bottom
LOGO5  SFE_LOGO_NAME.1_INCH  [SFE_LOGO_NAME_.1]  50.55,20.83 0 top
LOGO6  SFE_LOGO_NAME_FLAME.1_INCH  [SFE_LOGO_NAME_FLAME_.1]  44.7,43.18 0 bottom
LOGO7  OSHW-LOGOMINI  [OSHW-LOGO-MINI]  89.15,13.21 0 bottom
LOGO8  SFE_LOGO_NAME.1_INCH  [SFE_LOGO_NAME_.1]  78.99,20.83 0 top
LOGO9  SFE_LOGO_NAME_FLAME.1_INCH  [SFE_LOGO_NAME_FLAME_.1]  73.15,43.18 0 bottom
LOGO10  OSHW-LOGOMINI  [OSHW-LOGO-MINI]  117.6,13.21 0 bottom
LOGO11  SFE_LOGO_NAME.1_INCH  [SFE_LOGO_NAME_.1]  107.44,20.83 0 top
LOGO12  SFE_LOGO_NAME_FLAME.1_INCH  [SFE_LOGO_NAME_FLAME_.1]  101.6,43.18 0 bottom
LOGO13  OSHW-LOGOMINI  [OSHW-LOGO-MINI]  146.05,13.21 0 bottom
LOGO14  SFE_LOGO_NAME.1_INCH  [SFE_LOGO_NAME_.1]  135.89,20.83 0 top
LOGO15  SFE_LOGO_NAME_FLAME.1_INCH  [SFE_LOGO_NAME_FLAME_.1]  130.05,43.18 0 bottom
LOGO16  OSHW-LOGOMINI  [OSHW-LOGO-MINI]  174.5,13.21 0 bottom
LOGO17  SFE_LOGO_NAME.1_INCH  [SFE_LOGO_NAME_.1]  164.34,20.83 0 top
LOGO18  SFE_LOGO_NAME_FLAME.1_INCH  [SFE_LOGO_NAME_FLAME_.1]  158.5,43.18 0 bottom
LOGO19  OSHW-LOGOMINI  [OSHW-LOGO-MINI]  202.95,13.21 0 bottom
LOGO20  SFE_LOGO_NAME.1_INCH  [SFE_LOGO_NAME_.1]  192.79,20.83 0 top
LOGO21  SFE_LOGO_NAME_FLAME.1_INCH  [SFE_LOGO_NAME_FLAME_.1]  186.94,43.18 0 bottom
LOGO22  OSHW-LOGOMINI  [OSHW-LOGO-MINI]  231.39,13.21 0 bottom
LOGO23  SFE_LOGO_NAME.1_INCH  [SFE_LOGO_NAME_.1]  221.23,20.83 0 top
LOGO24  SFE_LOGO_NAME_FLAME.1_INCH  [SFE_LOGO_NAME_FLAME_.1]  215.39,43.18 0 bottom
LOGO25  OSHW-LOGOMINI  [OSHW-LOGO-MINI]  32.26,64.52 0 bottom
LOGO26  SFE_LOGO_NAME.1_INCH  [SFE_LOGO_NAME_.1]  22.1,72.14 0 top
LOGO27  SFE_LOGO_NAME_FLAME.1_INCH  [SFE_LOGO_NAME_FLAME_.1]  16.26,94.49 0 bottom
LOGO28  OSHW-LOGOMINI  [OSHW-LOGO-MINI]  60.71,64.52 0 bottom
LOGO29  SFE_LOGO_NAME.1_INCH  [SFE_LOGO_NAME_.1]  50.55,72.14 0 top
LOGO30  SFE_LOGO_NAME_FLAME.1_INCH  [SFE_LOGO_NAME_FLAME_.1]  44.7,94.49 0 bottom
LOGO31  OSHW-LOGOMINI  [OSHW-LOGO-MINI]  89.15,64.52 0 bottom
LOGO32  SFE_LOGO_NAME.1_INCH  [SFE_LOGO_NAME_.1]  78.99,72.14 0 top
LOGO33  SFE_LOGO_NAME_FLAME.1_INCH  [SFE_LOGO_NAME_FLAME_.1]  73.15,94.49 0 bottom
LOGO34  OSHW-LOGOMINI  [OSHW-LOGO-MINI]  117.6,64.52 0 bottom
LOGO35  SFE_LOGO_NAME.1_INCH  [SFE_LOGO_NAME_.1]  107.44,72.14 0 top
LOGO36  SFE_LOGO_NAME_FLAME.1_INCH  [SFE_LOGO_NAME_FLAME_.1]  101.6,94.49 0 bottom
LOGO37  OSHW-LOGOMINI  [OSHW-LOGO-MINI]  146.05,64.52 0 bottom
LOGO38  SFE_LOGO_NAME.1_INCH  [SFE_LOGO_NAME_.1]  135.89,72.14 0 top
LOGO39  SFE_LOGO_NAME_FLAME.1_INCH  [SFE_LOGO_NAME_FLAME_.1]  130.05,94.49 0 bottom
LOGO40  OSHW-LOGOMINI  [OSHW-LOGO-MINI]  174.5,64.52 0 bottom
LOGO41  SFE_LOGO_NAME.1_INCH  [SFE_LOGO_NAME_.1]  164.34,72.14 0 top
LOGO42  SFE_LOGO_NAME_FLAME.1_INCH  [SFE_LOGO_NAME_FLAME_.1]  158.5,94.49 0 bottom
LOGO43  OSHW-LOGOMINI  [OSHW-LOGO-MINI]  202.95,64.52 0 bottom
LOGO44  SFE_LOGO_NAME.1_INCH  [SFE_LOGO_NAME_.1]  192.79,72.14 0 top
LOGO45  SFE_LOGO_NAME_FLAME.1_INCH  [SFE_LOGO_NAME_FLAME_.1]  186.94,94.49 0 bottom
LOGO46  OSHW-LOGOMINI  [OSHW-LOGO-MINI]  231.39,64.52 0 bottom
LOGO47  SFE_LOGO_NAME.1_INCH  [SFE_LOGO_NAME_.1]  221.23,72.14 0 top
LOGO48  SFE_LOGO_NAME_FLAME.1_INCH  [SFE_LOGO_NAME_FLAME_.1]  215.39,94.49 0 bottom
R1  10k  [0603]  23.37,15.75 180 top
R2  2.2k  [0603]  32.26,15.75 90 top
R3  1k  [0603]  32.26,32 180 top
R4  2.2k  [0603]  19.56,15.75 180 top
R5  10k  [0603]  32.26,41.4 180 top
R6  2.2k  [0603]  29.72,15.75 90 top
R7  10k  [0603]  27.18,15.75 180 top
R8  4.7k  [0603]  19.56,32.26 180 top
R9  10k  [0603]  32.26,44.96 180 top
R10  10k  [0603]  32.26,36.45 180 top
R11  100k  [0603]  32.26,39.88 180 top
R12  1k  [0603]  60.71,32 180 top
R13  5.1k  [0603]  10.67,15.11 90 bottom
R14  5.1k  [0603]  10.67,18.92 270 bottom
R15  2.2k  [0603]  60.71,15.75 90 top
R16  2.2k  [0603]  58.17,15.75 90 top
R17  4.7k  [0603]  48.01,32.26 180 top
R18  10k  [0603]  60.71,36.45 180 top
R19  100k  [0603]  60.71,39.88 180 top
R20  10k  [0603]  51.82,15.75 180 top
R21  2.2k  [0603]  48.01,15.75 180 top
R22  10k  [0603]  60.71,41.4 180 top
R23  10k  [0603]  60.71,44.96 180 top
R24  5.1k  [0603]  39.12,15.11 90 bottom
R25  5.1k  [0603]  39.12,18.92 270 bottom
R26  10k  [0603]  55.63,15.75 180 top
R27  1k  [0603]  89.15,32 180 top
R28  2.2k  [0603]  89.15,15.75 90 top
R29  2.2k  [0603]  86.61,15.75 90 top
R30  4.7k  [0603]  76.45,32.26 180 top
R31  10k  [0603]  89.15,36.45 180 top
R32  100k  [0603]  89.15,39.88 180 top
R33  10k  [0603]  80.26,15.75 180 top
R34  2.2k  [0603]  76.45,15.75 180 top
R35  10k  [0603]  89.15,41.4 180 top
R36  10k  [0603]  89.15,44.96 180 top
R37  5.1k  [0603]  67.56,15.11 90 bottom
R38  5.1k  [0603]  67.56,18.92 270 bottom
R39  10k  [0603]  84.07,15.75 180 top
R40  1k  [0603]  117.6,32 180 top
R41  2.2k  [0603]  117.6,15.75 90 top
R42  2.2k  [0603]  115.06,15.75 90 top
R43  4.7k  [0603]  104.9,32.26 180 top
R44  10k  [0603]  117.6,36.45 180 top
R45  100k  [0603]  117.6,39.88 180 top
R46  10k  [0603]  108.71,15.75 180 top
R47  2.2k  [0603]  104.9,15.75 180 top
R48  10k  [0603]  117.6,41.4 180 top
R49  10k  [0603]  117.6,44.96 180 top
R50  5.1k  [0603]  96.01,15.11 90 bottom
R51  5.1k  [0603]  96.01,18.92 270 bottom
R52  10k  [0603]  112.52,15.75 180 top
R53  1k  [0603]  146.05,32 180 top
R54  2.2k  [0603]  146.05,15.75 90 top
R55  2.2k  [0603]  143.51,15.75 90 top
R56  4.7k  [0603]  133.35,32.26 180 top
R57  10k  [0603]  146.05,36.45 180 top
R58  100k  [0603]  146.05,39.88 180 top
R59  10k  [0603]  137.16,15.75 180 top
R60  2.2k  [0603]  133.35,15.75 180 top
R61  10k  [0603]  146.05,41.4 180 top
R62  10k  [0603]  146.05,44.96 180 top
R63  5.1k  [0603]  124.46,15.11 90 bottom
R64  5.1k  [0603]  124.46,18.92 270 bottom
R65  10k  [0603]  140.97,15.75 180 top
R66  1k  [0603]  174.5,32 180 top
R67  2.2k  [0603]  174.5,15.75 90 top
R68  2.2k  [0603]  171.96,15.75 90 top
R69  4.7k  [0603]  161.8,32.26 180 top
R70  10k  [0603]  174.5,36.45 180 top
R71  100k  [0603]  174.5,39.88 180 top
R72  10k  [0603]  165.61,15.75 180 top
R73  2.2k  [0603]  161.8,15.75 180 top
R74  10k  [0603]  174.5,41.4 180 top
R75  10k  [0603]  174.5,44.96 180 top
R76  5.1k  [0603]  152.91,15.11 90 bottom
R77  5.1k  [0603]  152.91,18.92 270 bottom
R78  10k  [0603]  169.42,15.75 180 top
R79  1k  [0603]  202.95,32 180 top
R80  2.2k  [0603]  202.95,15.75 90 top
R81  2.2k  [0603]  200.41,15.75 90 top
R82  4.7k  [0603]  190.25,32.26 180 top
R83  10k  [0603]  202.95,36.45 180 top
R84  100k  [0603]  202.95,39.88 180 top
R85  10k  [0603]  194.06,15.75 180 top
R86  2.2k  [0603]  190.25,15.75 180 top
R87  10k  [0603]  202.95,41.4 180 top
R88  10k  [0603]  202.95,44.96 180 top
R89  5.1k  [0603]  181.36,15.11 90 bottom
R90  5.1k  [0603]  181.36,18.92 270 bottom
R91  10k  [0603]  197.87,15.75 180 top
R92  1k  [0603]  231.39,32 180 top
R93  2.2k  [0603]  231.39,15.75 90 top
R94  2.2k  [0603]  228.85,15.75 90 top
R95  4.7k  [0603]  218.69,32.26 180 top
R96  10k  [0603]  231.39,36.45 180 top
R97  100k  [0603]  231.39,39.88 180 top
R98  10k  [0603]  222.5,15.75 180 top
R99  2.2k  [0603]  218.69,15.75 180 top
R100  10k  [0603]  231.39,41.4 180 top
R101  10k  [0603]  231.39,44.96 180 top
R102  5.1k  [0603]  209.8,15.11 90 bottom
R103  5.1k  [0603]  209.8,18.92 270 bottom
R104  10k  [0603]  226.31,15.75 180 top
R105  1k  [0603]  32.26,83.31 180 top
R106  2.2k  [0603]  32.26,67.06 90 top
R107  2.2k  [0603]  29.72,67.06 90 top
R108  4.7k  [0603]  19.56,83.57 180 top
R109  10k  [0603]  32.26,87.76 180 top
R110  100k  [0603]  32.26,91.19 180 top
R111  10k  [0603]  23.37,67.06 180 top
R112  2.2k  [0603]  19.56,67.06 180 top
R113  10k  [0603]  32.26,92.71 180 top
R114  10k  [0603]  32.26,96.27 180 top
R115  5.1k  [0603]  10.67,66.42 90 bottom
R116  5.1k  [0603]  10.67,70.23 270 bottom
R117  10k  [0603]  27.18,67.06 180 top
R118  1k  [0603]  60.71,83.31 180 top
R119  2.2k  [0603]  60.71,67.06 90 top
R120  2.2k  [0603]  58.17,67.06 90 top
R121  4.7k  [0603]  48.01,83.57 180 top
R122  10k  [0603]  60.71,87.76 180 top
R123  100k  [0603]  60.71,91.19 180 top
R124  10k  [0603]  51.82,67.06 180 top
R125  2.2k  [0603]  48.01,67.06 180 top
R126  10k  [0603]  60.71,92.71 180 top
R127  10k  [0603]  60.71,96.27 180 top
R128  5.1k  [0603]  39.12,66.42 90 bottom
R129  5.1k  [0603]  39.12,70.23 270 bottom
R130  10k  [0603]  55.63,67.06 180 top
R131  1k  [0603]  89.15,83.31 180 top
R132  2.2k  [0603]  89.15,67.06 90 top
R133  2.2k  [0603]  86.61,67.06 90 top
R134  4.7k  [0603]  76.45,83.57 180 top
R135  10k  [0603]  89.15,87.76 180 top
R136  100k  [0603]  89.15,91.19 180 top
R137  10k  [0603]  80.26,67.06 180 top
R138  2.2k  [0603]  76.45,67.06 180 top
R139  10k  [0603]  89.15,92.71 180 top
R140  10k  [0603]  89.15,96.27 180 top
R141  5.1k  [0603]  67.56,66.42 90 bottom
R142  5.1k  [0603]  67.56,70.23 270 bottom
R143  10k  [0603]  84.07,67.06 180 top
R144  1k  [0603]  117.6,83.31 180 top
R145  2.2k  [0603]  117.6,67.06 90 top
R146  2.2k  [0603]  115.06,67.06 90 top
R147  4.7k  [0603]  104.9,83.57 180 top
R148  10k  [0603]  117.6,87.76 180 top
R149  100k  [0603]  117.6,91.19 180 top
R150  10k  [0603]  108.71,67.06 180 top
R151  2.2k  [0603]  104.9,67.06 180 top
R152  10k  [0603]  117.6,92.71 180 top
R153  10k  [0603]  117.6,96.27 180 top
R154  5.1k  [0603]  96.01,66.42 90 bottom
R155  5.1k  [0603]  96.01,70.23 270 bottom
R156  10k  [0603]  112.52,67.06 180 top
R157  1k  [0603]  146.05,83.31 180 top
R158  2.2k  [0603]  146.05,67.06 90 top
R159  2.2k  [0603]  143.51,67.06 90 top
R160  4.7k  [0603]  133.35,83.57 180 top
R161  10k  [0603]  146.05,87.76 180 top
R162  100k  [0603]  146.05,91.19 180 top
R163  10k  [0603]  137.16,67.06 180 top
R164  2.2k  [0603]  133.35,67.06 180 top
R165  10k  [0603]  146.05,92.71 180 top
R166  10k  [0603]  146.05,96.27 180 top
R167  5.1k  [0603]  124.46,66.42 90 bottom
R168  5.1k  [0603]  124.46,70.23 270 bottom
R169  10k  [0603]  140.97,67.06 180 top
R170  1k  [0603]  174.5,83.31 180 top
R171  2.2k  [0603]  174.5,67.06 90 top
R172  2.2k  [0603]  171.96,67.06 90 top
R173  4.7k  [0603]  161.8,83.57 180 top
R174  10k  [0603]  174.5,87.76 180 top
R175  100k  [0603]  174.5,91.19 180 top
R176  10k  [0603]  165.61,67.06 180 top
R177  2.2k  [0603]  161.8,67.06 180 top
R178  10k  [0603]  174.5,92.71 180 top
R179  10k  [0603]  174.5,96.27 180 top
R180  5.1k  [0603]  152.91,66.42 90 bottom
R181  5.1k  [0603]  152.91,70.23 270 bottom
R182  10k  [0603]  169.42,67.06 180 top
R183  1k  [0603]  202.95,83.31 180 top
R184  2.2k  [0603]  202.95,67.06 90 top
R185  2.2k  [0603]  200.41,67.06 90 top
R186  4.7k  [0603]  190.25,83.57 180 top
R187  10k  [0603]  202.95,87.76 180 top
R188  100k  [0603]  202.95,91.19 180 top
R189  10k  [0603]  194.06,67.06 180 top
R190  2.2k  [0603]  190.25,67.06 180 top
R191  10k  [0603]  202.95,92.71 180 top
R192  10k  [0603]  202.95,96.27 180 top
R193  5.1k  [0603]  181.36,66.42 90 bottom
R194  5.1k  [0603]  181.36,70.23 270 bottom
R195  10k  [0603]  197.87,67.06 180 top
R196  1k  [0603]  231.39,83.31 180 top
R197  2.2k  [0603]  231.39,67.06 90 top
R198  2.2k  [0603]  228.85,67.06 90 top
R199  4.7k  [0603]  218.69,83.57 180 top
R200  10k  [0603]  231.39,87.76 180 top
R201  100k  [0603]  231.39,91.19 180 top
R202  10k  [0603]  222.5,67.06 180 top
R203  2.2k  [0603]  218.69,67.06 180 top
R204  10k  [0603]  231.39,92.71 180 top
R205  10k  [0603]  231.39,96.27 180 top
R206  5.1k  [0603]  209.8,66.42 90 bottom
R207  5.1k  [0603]  209.8,70.23 270 bottom
R208  10k  [0603]  226.31,67.06 180 top
U1  TPA2005D1  [QFN-8_PAD]  28.45,38.61 90 top
U2  WT2003S  [SO16]  22.1,17.02 0 bottom
U3  AP2112-3.3V  [SOT23-5]  29.72,17.02 90 bottom
U4  ATTINY84-ARDUINO  [SO14]  22.1,27.18 180 top
U5  WT2003S  [SO16]  50.55,17.02 0 bottom
U6  TPA2005D1  [QFN-8_PAD]  56.9,38.61 90 top
U7  ATTINY84-ARDUINO  [SO14]  50.55,27.18 180 top
U8  AP2112-3.3V  [SOT23-5]  58.17,17.02 90 bottom
U9  WT2003S  [SO16]  78.99,17.02 0 bottom
U10  TPA2005D1  [QFN-8_PAD]  85.34,38.61 90 top
U11  ATTINY84-ARDUINO  [SO14]  78.99,27.18 180 top
U12  AP2112-3.3V  [SOT23-5]  86.61,17.02 90 bottom
U13  WT2003S  [SO16]  107.44,17.02 0 bottom
U14  TPA2005D1  [QFN-8_PAD]  113.79,38.61 90 top
U15  ATTINY84-ARDUINO  [SO14]  107.44,27.18 180 top
U16  AP2112-3.3V  [SOT23-5]  115.06,17.02 90 bottom
U17  WT2003S  [SO16]  135.89,17.02 0 bottom
U18  TPA2005D1  [QFN-8_PAD]  142.24,38.61 90 top
U19  ATTINY84-ARDUINO  [SO14]  135.89,27.18 180 top
U20  AP2112-3.3V  [SOT23-5]  143.51,17.02 90 bottom
U21  WT2003S  [SO16]  164.34,17.02 0 bottom
U22  TPA2005D1  [QFN-8_PAD]  170.69,38.61 90 top
U23  ATTINY84-ARDUINO  [SO14]  164.34,27.18 180 top
U24  AP2112-3.3V  [SOT23-5]  171.96,17.02 90 bottom
U25  WT2003S  [SO16]  192.79,17.02 0 bottom
U26  TPA2005D1  [QFN-8_PAD]  199.14,38.61 90 top
U27  ATTINY84-ARDUINO  [SO14]  192.79,27.18 180 top
U28  AP2112-3.3V  [SOT23-5]  200.41,17.02 90 bottom
U29  WT2003S  [SO16]  221.23,17.02 0 bottom
U30  TPA2005D1  [QFN-8_PAD]  227.58,38.61 90 top
U31  ATTINY84-ARDUINO  [SO14]  221.23,27.18 180 top
U32  AP2112-3.3V  [SOT23-5]  228.85,17.02 90 bottom
U33  WT2003S  [SO16]  22.1,68.33 0 bottom
U34  TPA2005D1  [QFN-8_PAD]  28.45,89.92 90 top
U35  ATTINY84-ARDUINO  [SO14]  22.1,78.49 180 top
U36  AP2112-3.3V  [SOT23-5]  29.72,68.33 90 bottom
U37  WT2003S  [SO16]  50.55,68.33 0 bottom
U38  TPA2005D1  [QFN-8_PAD]  56.9,89.92 90 top
U39  ATTINY84-ARDUINO  [SO14]  50.55,78.49 180 top
U40  AP2112-3.3V  [SOT23-5]  58.17,68.33 90 bottom
U41  WT2003S  [SO16]  78.99,68.33 0 bottom
U42  TPA2005D1  [QFN-8_PAD]  85.34,89.92 90 top
U43  ATTINY84-ARDUINO  [SO14]  78.99,78.49 180 top
U44  AP2112-3.3V  [SOT23-5]  86.61,68.33 90 bottom
U45  WT2003S  [SO16]  107.44,68.33 0 bottom
U46  TPA2005D1  [QFN-8_PAD]  113.79,89.92 90 top
U47  ATTINY84-ARDUINO  [SO14]  107.44,78.49 180 top
U48  AP2112-3.3V  [SOT23-5]  115.06,68.33 90 bottom
U49  WT2003S  [SO16]  135.89,68.33 0 bottom
U50  TPA2005D1  [QFN-8_PAD]  142.24,89.92 90 top
U51  ATTINY84-ARDUINO  [SO14]  135.89,78.49 180 top
U52  AP2112-3.3V  [SOT23-5]  143.51,68.33 90 bottom
U53  WT2003S  [SO16]  164.34,68.33 0 bottom
U54  TPA2005D1  [QFN-8_PAD]  170.69,89.92 90 top
U55  ATTINY84-ARDUINO  [SO14]  164.34,78.49 180 top
U56  AP2112-3.3V  [SOT23-5]  171.96,68.33 90 bottom
U57  WT2003S  [SO16]  192.79,68.33 0 bottom
U58  TPA2005D1  [QFN-8_PAD]  199.14,89.92 90 top
U59  ATTINY84-ARDUINO  [SO14]  192.79,78.49 180 top
U60  AP2112-3.3V  [SOT23-5]  200.41,68.33 90 bottom
U61  WT2003S  [SO16]  221.23,68.33 0 bottom
U62  TPA2005D1  [QFN-8_PAD]  227.58,89.92 90 top
U63  ATTINY84-ARDUINO  [SO14]  221.23,78.49 180 top
U64  AP2112-3.3V  [SOT23-5]  228.85,68.33 90 bottom
U$1  [MP31]  27.69,50.42 0 top
U$2  [3#3V2]  46.74,8.51 90 top
U$3  [GND1]  15.75,8.51 90 bottom
U$4  [3#3V2]  18.29,8.51 90 bottom
U$5  [SDA8]  20.83,8.51 90 bottom
U$6  [SCL9]  23.37,8.51 90 bottom
U$7  [RST#-[>]  28.45,8.38 90 top
U$8  [I_SUPER2_C-()-03]  29.59,20.19 0 top
U$9  [INT#-[<]  25.91,8.38 90 top
U$10  [#6]  26.04,47.12 90 top
U$11  [INT#-[<]  25.91,8.38 90 bottom
U$12  [#5]  24.51,40.13 90 top
U$13  [#6]  24.38,34.29 90 top
U$14  [SPEAKER1]  28.19,34.8 90 bottom
U$15  [PHONES0]  22.61,42.67 90 top
U$16  [RST#-[>]  28.45,8.38 90 bottom
U$17  [PWR-()-03]  30.23,34.92 0 top
U$18  [ADR-()-03]  24.64,32.26 0 top
U$19  [1_1]  18.29,50.8 90 top
U$20  [SPEAKER1]  9.78,32.26 0 top
U$21  [3#3V2]  18.29,8.51 90 top
U$22  [GND1]  15.75,8.51 90 top
U$23  [QWIIC0]  27.05,52.32 0 top
U$24  [QWIIC_MP32]  24.38,40.64 0 bottom
U$25  [#6]  26.8,35.69 90 bottom
U$26  [SCL9]  23.37,8.51 90 top
U$27  [SDA8]  20.83,8.51 90 top
U$28  [#5]  26.54,38.35 90 bottom
U$29  [TRIGGER5]  15.75,50.16 90 top
U$30  [GND1]  44.2,8.51 90 top
U$31  [43]  25.91,50.8 90 bottom
U$32  [21]  20.83,50.67 90 top
U$33  [32]  23.37,50.67 90 top
U$34  [43]  25.91,50.8 90 top
U$35  [GND0]  26.54,56.39 0 top
U$36  [32]  23.37,50.67 90 bottom
U$37  [L12]  26.29,42.29 90 top
U$38  [#6]  26.54,47.12 90 bottom
U$39  [R11]  26.29,44.83 90 bottom
U$40  [PHONES0]  28.07,42.42 90 bottom
U$41  [L12]  26.29,42.29 90 bottom
U$42  [21]  20.83,50.67 90 bottom
U$43  [R11]  26.29,44.83 90 top
U$44  [1_1]  18.29,50.8 90 bottom
U$45  [TRIGGER5]  15.88,50.16 90 bottom
U$46  [GND0]  30.1,56.39 0 bottom
U$47  [QWIIC-LOGO-MEDIUM]  29.72,28.45 0 bottom
U$48  [SCL9]  51.82,8.51 90 top
U$49  [TRIGGER4]  22.23,38.1 0 bottom
U$50  [TRIGGER2]  26.54,48.64 0 top
U$51  [SDA8]  49.28,8.51 90 top
U$52  [GND1]  44.2,8.51 90 bottom
U$53  [3#3V2]  46.74,8.51 90 bottom
U$54  [SDA8]  49.28,8.51 90 bottom
U$55  [SCL9]  51.82,8.51 90 bottom
U$56  [I_SUPER2_C-()-03]  58.04,20.19 0 top
U$57  [INT#-[<]  54.36,8.38 90 top
U$58  [INT#-[<]  54.36,8.38 90 bottom
U$59  [RST#-[>]  56.9,8.38 90 top
U$60  [RST#-[>]  56.9,8.38 90 bottom
U$61  [PWR-()-03]  58.67,34.92 0 top
U$62  [ADR-()-03]  53.09,32.26 0 top
U$63  [TRIGGER5]  44.2,50.16 90 top
U$64  [21]  49.28,50.67 90 top
U$65  [32]  51.82,50.67 90 top
U$66  [43]  54.36,50.8 90 top
U$67  [#5]  52.96,40.13 90 top
U$68  [#6]  52.83,34.29 90 top
U$69  [1_1]  46.74,50.8 90 top
U$70  [GND0]  54.99,56.39 0 top
U$71  [L12]  54.74,42.29 90 top
U$72  [R11]  54.74,44.83 90 top
U$73  [#6]  54.48,47.12 90 top
U$74  [PHONES0]  51.05,42.67 90 top
U$75  [SPEAKER1]  38.23,32.26 0 top
U$76  [QWIIC_MP32]  52.83,40.64 0 bottom
U$77  [#6]  55.25,35.69 90 bottom
U$78  [#5]  54.99,38.35 90 bottom
U$79  [43]  54.36,50.8 90 bottom
U$80  [32]  51.82,50.67 90 bottom
U$81  [#6]  54.99,47.12 90 bottom
U$82  [R11]  54.74,44.83 90 bottom
U$83  [L12]  54.74,42.29 90 bottom
U$84  [21]  49.28,50.67 90 bottom
U$85  [1_1]  46.74,50.8 90 bottom
U$86  [TRIGGER5]  44.32,50.16 90 bottom
U$87  [GND0]  58.55,56.39 0 bottom
U$88  [PHONES0]  56.52,42.42 90 bottom
U$89  [SPEAKER1]  56.64,34.8 90 bottom
U$90  [QWIIC-LOGO-MEDIUM]  58.17,28.45 0 bottom
U$91  [TRIGGER4]  50.67,38.1 0 bottom
U$92  [MP31]  56.13,50.42 0 top
U$93  [QWIIC0]  55.5,52.32 0 top
U$94  [TRIGGER2]  54.99,48.64 0 top
U$95  [3#3V2]  75.18,8.51 90 top
U$96  [GND1]  72.64,8.51 90 top
U$97  [SCL9]  80.26,8.51 90 top
U$98  [SDA8]  77.72,8.51 90 top
U$99  [GND1]  72.64,8.51 90 bottom
U$100  [3#3V2]  75.18,8.51 90 bottom
U$101  [SDA8]  77.72,8.51 90 bottom
U$102  [SCL9]  80.26,8.51 90 bottom
U$103  [I_SUPER2_C-()-03]  86.49,20.19 0 top
U$104  [INT#-[<]  82.8,8.38 90 top
U$105  [INT#-[<]  82.8,8.38 90 bottom